# Altium PCB USB2UART.PcbDoc
Units mm, origin at the board's own origin, x right, y up, seen from the top; angles counter-clockwise.
Board outline 35.56 x 22.86 mm, 2 copper layers (Top Layer, Bottom Layer), stack 1.569 mm thick; 26 components, 19 nets, 130 pads, 26 vias.
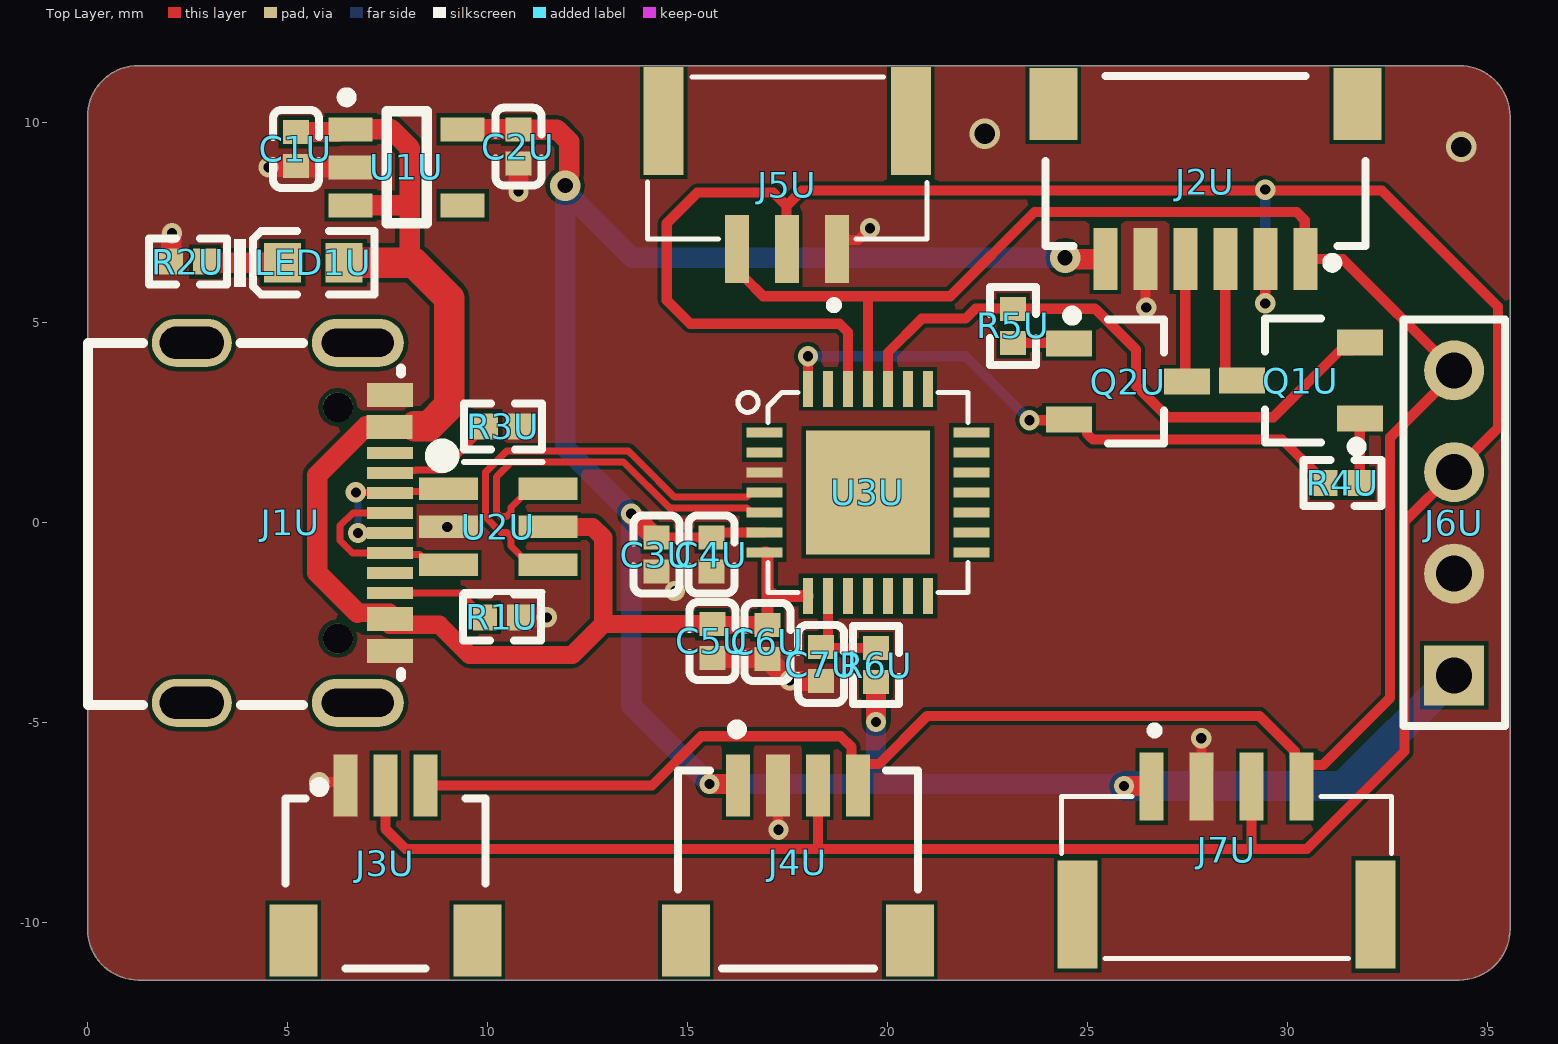
[diagram p0: Top Layer view]
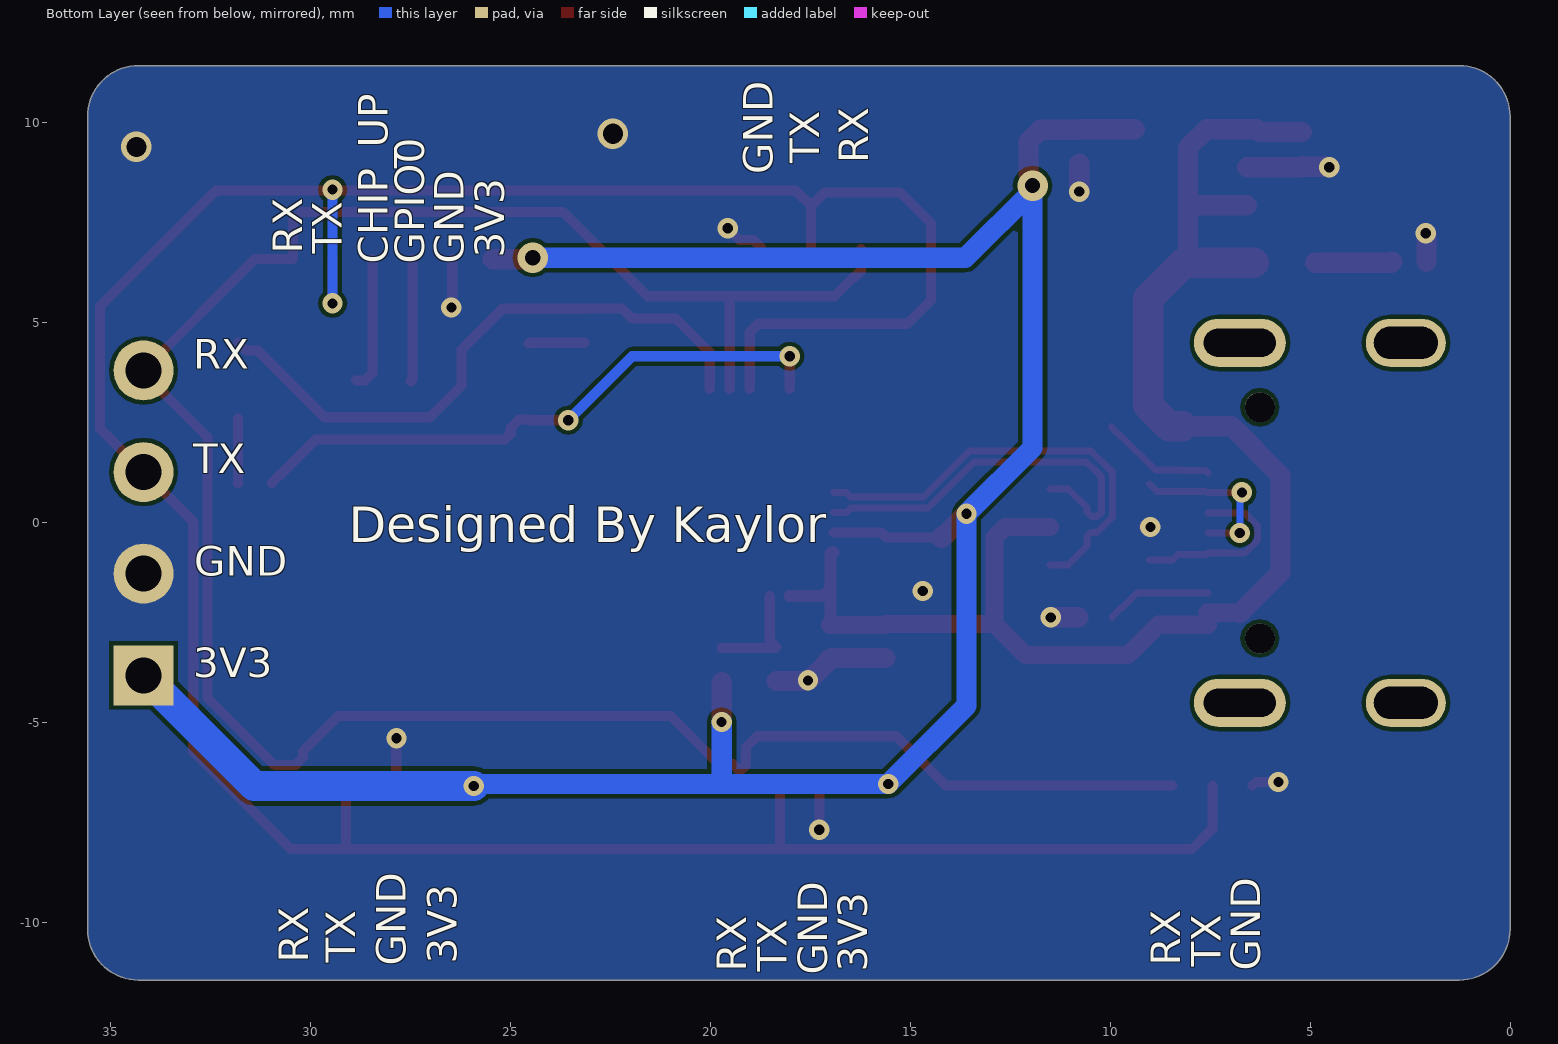
[diagram p1: Bottom Layer view, seen from below]
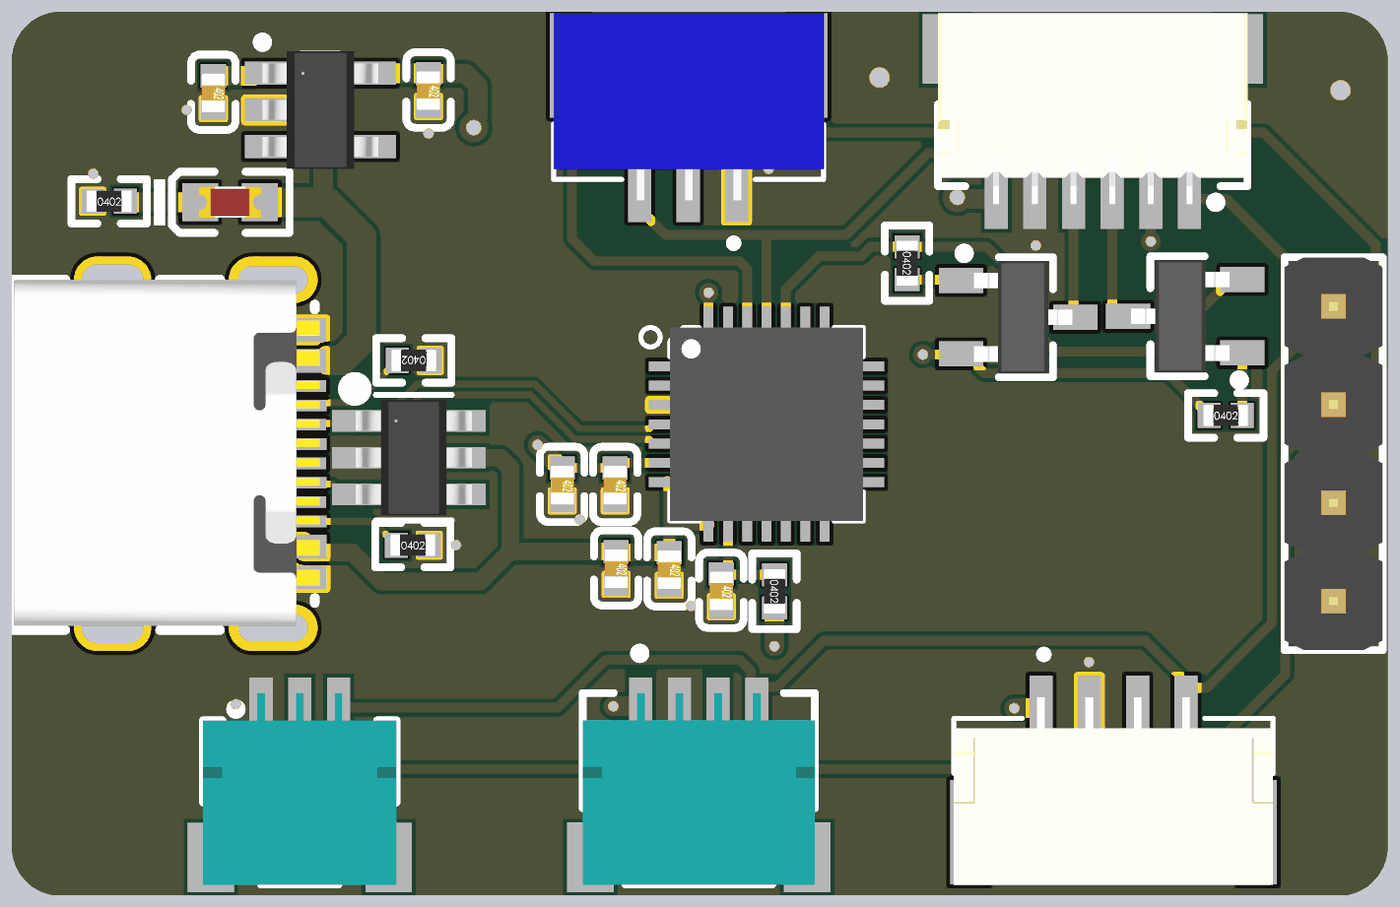
[diagram p2: 3D render of the assembled board from above, using the file's embedded part models]

## Layer stack, top to bottom
Top Solder: solder mask 0.0254, SM-001, Dk 4
Top Layer: signal copper 0.035
Dielectric 1: core 1.4986, Core-043, Dk 4.3
Bottom Layer: signal copper 0.035
Bottom Solder: solder mask 0.0254, SM-001, Dk 4

## Board outline
0,-10.16 ccw(c1.27,-10.16) 1.27,-11.43 34.29,-11.43 ccw(c34.29,-10.16) 35.56,-10.16 35.56,10.16 ccw(c34.29,10.16) 34.29,11.43 1.27,11.43 ccw(c1.27,10.16) 0,10.16

## Design rules (kind name [scope] priority, off if disabled: settings)
Clearance [All] p1: gap=0.102 ignorepadtopadclearanceinfootprint=FALSE
DiffPairsRouting [All] p1: maxlimit=0.102 minlimit=0.102 mostfreqgap=0.102 toplayer_minwidth=0.175 toplayer_maxwidth=0.175 toplayer_prefwidth=0.175 bottomlayer_minwidth=0.175 bottomlayer_maxwidth=0.175 bottomlayer_prefwidth=0.175 maxuncoupledlength=12.7
HoleSize [All] p1: absolutevalues=TRUE maxlimit=5.08 minlimit=0.025 maxpercent=80.000 minpercent=20.000
MinimumSolderMaskSliver [All] p1: minsoldermaskwidth=0
PolygonConnect [All] p1: connectstyle=Direct reliefconductorwidth=0.254 reliefentries=4 polygonreliefangle="90 Angle" airgapwidth=0.254
RoutingVias [All] p1: holewidth=0.711 width=1.27 viastyle="Through Hole" minholewidth=0.254 minwidth=0.508 maxholewidth=5.08 maxwidth=12.7
SilkToSilkClearance [All] p1: silktosilkclearance=0.025
SilkToSolderMaskClearance [IsPad] p1: minsilkscreentomaskgap=0.025 clearancetoexposedcopper=TRUE
SolderMaskExpansion [All] p1: expansion=0.102 istentingtop=FALSE
Width [All] p1: maxlimit=5.08 minlimit=0.076 preferedwidth=0.254
25 further rules are at their usual default settings.

## Classes and differential pairs
differential pair USB: +USB_P -USB_N

## Components (designator, comment, footprint, x,y, rotation, side; value= is the part's Value field where it differs from the comment)
C1U "0402 1uF（105）10% 35V" C0402 5.207,9.347 r270 top value="1uF 35V"
C2U "0402 1uF（105）10% 35V" C0402 10.77,9.405 r270 top value="1uF 35V"
C3U "0402 4.7uF(475) ±10% 10V" c0402 14.224,-0.794 r270 top value="4.7uF 10V"
C4U "0402 100nF (104) 10% 50V" C0402 15.596,-0.794 r270 top value="100nF 50V"
C5U "0402 1uF（105）10% 35V" C0402 15.621,-2.953 r270 top value="1uF 35V"
C6U "0402 100nF (104) 10% 50V" C0402 16.993,-2.979 r270 top value="100nF 50V"
C7U "0402 100nF (104) 10% 50V" C0402 18.339,-3.531 r270 top value="100nF 50V"
J1U "TYPE-C-31-M-12" TYPE-C-31-M-12 5.08,0 r90 top
J2U "SM06B-SRSS-TB(LF)(SN)" SM06B-SRSS-TB(LF)(SN) 27.94,9.042 r180 top
J3U "SM03B-SRSS-TB(LF)(SN)" SM03B-SRSS-TB(LF)(SN) 7.442,-9.017 r0 top
J4U "SM04B-SRSS-TB(LF)(SN)" SM04B-SRSS-TB(LF)(SN) 17.755,-8.661 r0 top
J5U "A1257WR-S-3P" SM03B-GHS-TB(LF)(SN) 17.501,9.119 r180 top
J6U "Header4x1 Male" 4x1 34.163,0 r90 top
J7U "A1257WR-S-4P" SM04B-GHS-TB(LF)(SN) 28.473,-8.865 r0 top
LED1U "LED_GREEN 0603" led0603 5.639,6.502 r0 top value=1mA@2.6V
Q1U "SS8550" sot-23-3 30.328,3.556 r0 top
Q2U "SS8550" sot-23-3 26.01,3.531 r180 top
R1U "0402 5.1KΩ (5101) ±1%" r0402 10.363,-2.362 r0 top value=5.1KΩ±1%
R2U "0402 4.7KΩ (4701) ±1%" r0402 2.515,6.528 r0 top value=4.7KΩ±1%
R3U "0402 5.1KΩ (5101) ±1%" r0402 10.389,2.413 r180 top value=5.1KΩ±1%
R4U "0402 4.7KΩ (4701) ±1%" r0402 31.376,0.991 r0 top value=4.7KΩ±1%
R5U "0402 4.7KΩ (4701) ±1%" r0402 23.139,4.928 r270 top value=4.7KΩ±1%
R6U "0402 4.7KΩ (4701) ±1%" r0402 19.71,-3.556 r270 top value=4.7KΩ±1%
U1U "TLV75733PDBVR" sot-23-5 7.976,8.89 r180 top
U2U "USBLC6-2SC6" sot-23-6 10.262,-0.102 r0 top
U3U "CP2102-GM" QFN28_EP 19.507,0.762 r0 top

## Footprints (in the part's own frame and the unit in brackets; to place one, negate y for a bottom-side part, rotate by r counter-clockwise, add the part's x,y. Pads: shape width x height; smd on the part's side, far side on the other; paste and mask are expansions set on the pad)
4x1 [mm] "Connector; Header; 5 Position"
  rect 1.5x1.5 hole 0.9: 1(-3.81,0)
  round 1.5 hole 0.9: 2(-1.27,0) 3(1.27,0) 4(3.81,0)
  silkscreen extent -5.08,-1.27 5.08,1.27, body extent -5.08,-1.27 5.08,1.27, height 8.54
C0402 [mm]
  rect 0.6x0.65 smd mask+0.051: 1(-0.425,0) 2(0.425,0)
  silkscreen extent -0.97,-0.58 0.97,0.58, body extent -0.48,-0.3 0.52,0.3, height 0.2
c0402 [mm]
  rect 0.6x0.65 smd mask+0.051: 1(-0.425,0) 2(0.425,0)
  silkscreen extent -0.97,-0.58 0.97,0.58, body extent -0.48,-0.3 0.52,0.3, height 0.2
led0603 [mm]
  rect 0.93x0.98 smd: 1(0.77,0) 2(-0.77,0)
  silkscreen extent -1.98,-0.79 1.54,0.79, body extent -0.8,-0.4 0.8,0.4, height 0.6
QFN28_EP [mm]
  rect 0.9x0.254 smd: 1(-2.59,1.5) 2(-2.59,1) 3(-2.59,0.5) 4(-2.59,0) 5(-2.59,-0.5) 6(-2.59,-1) 7(-2.59,-1.5) 15(2.59,-1.5) 16(2.59,-1) 17(2.59,-0.5) 18(2.59,0) 19(2.59,0.5) 20(2.59,1) 21(2.59,1.5)
  rect 0.254x0.9 smd: 8(-1.5,-2.59) 9(-1,-2.59) 10(-0.5,-2.59) 11(0,-2.59) 12(0.5,-2.59) 13(1,-2.59) 14(1.5,-2.59) 22(1.5,2.59) 23(1,2.59) 24(0.5,2.59) 25(0,2.59) 26(-0.5,2.59) 27(-1,2.59) 28(-1.5,2.59)
  rect 3.1x3.1 smd paste-3: 29(0,0)
  silkscreen extent -3.25,-2.5 2.5,2.5, body extent -2.5,-2.5 2.5,2.5, height 1
r0402 [mm]
  rect 0.6x0.65 smd mask+0.051: 1(-0.425,0) 2(0.425,0)
  silkscreen extent -0.97,-0.58 0.97,0.58, body extent -0.57,-0.27 0.58,0.28, height 0.41
SM03B-GHS-TB(LF)(SN) [mm]
  rect 0.6x1.7 smd: 1(-1.23,2.275) 2(0.02,2.275) 3(1.27,2.275)
  rect 1x2.7 smd: 4(-3.08,-0.925) 5(3.1,-0.925)
  silkscreen extent -3.48,-2.02 3.5,3.77, body extent -3.5,-2.29 3.5,2.56, height 4.33
SM03B-SRSS-TB(LF)(SN) [mm]
  rect 0.6x1.55 smd paste+0 mask+0: 1(-1,2.45) 2(0,2.45) 3(1,2.45)
  rect 1.2x1.8 smd paste+0 mask+0: 4(-2.3,-1.425) 5(2.3,-1.425)
  silkscreen extent -2.5,-2.12 2.5,2.54, body extent -3,-2.42 3,3.32, height 0.25
SM04B-GHS-TB(LF)(SN) [mm]
  rect 0.6x1.7 smd: 1(-1.875,2.275) 2(-0.625,2.275) 3(0.625,2.275) 4(1.875,2.275)
  rect 1x2.7 smd: 5(-3.725,-0.925) 6(3.725,-0.925)
  silkscreen extent -4.13,-2.02 4.13,3.77, body extent -4.12,-2.29 4.12,2.56, height 4.35
SM04B-SRSS-TB(LF)(SN) [mm]
  rect 0.6x1.55 smd paste+0 mask+0: 1(-1.5,2.1) 2(-0.5,2.1) 3(0.5,2.1) 4(1.5,2.1)
  rect 1.2x1.8 smd paste+0 mask+0: 5(-2.8,-1.775) 6(2.8,-1.775)
  silkscreen extent -3,-2.47 3,3.62, body extent -3.5,-2.78 3.5,2.98, height 0.25
SM06B-SRSS-TB(LF)(SN) [mm]
  rect 0.6x1.55 smd paste+0 mask+0: 1(-2.5,2.45) 2(-1.5,2.45) 3(-0.5,2.45) 4(0.5,2.45) 5(1.5,2.45) 6(2.5,2.45)
  rect 1.2x1.8 smd paste+0 mask+0: 7(-3.8,-1.425) 8(3.8,-1.425)
  silkscreen extent -4,-2.12 4,2.66, body extent -4,-2.35 4,2.6, height 2.95
sot-23-3 [mm]
  rect 1.15x0.65 smd: 1(1.475,-0.95) 2(1.475,0.95) 3(-1.475,0)
  silkscreen extent -0.9,-1.78 1.52,1.55, body extent -1.4,-1.46 1.14,1.46, height 1
sot-23-5 [mm]
  rect 1.1x0.6 smd: 1(1.4,-0.95) 2(1.4,0) 3(1.4,0.95) 4(-1.4,0.95) 5(-1.4,-0.95)
  silkscreen extent -0.5,-1.87 1.62,1.4, body extent -1.5,-1.52 1.5,1.52, height 1.45
sot-23-6 [mil]
  rect 58x22 smd paste+0 mask+0: 1(-49,37.4) 2(-49,0) 3(-49,-37.4) 4(49,-37.4) 5(49,0) 6(49,37.4)
  silkscreen extent -62,-64 44,77, body extent -54,-59 64,59, height 57
TYPE-C-31-M-12 [mm]
  rect 0.3x1.15 smd: A1(3.35,-2.473) A4(2.55,-2.471) A5(1.25,-2.475) A6(0.25,-2.475) A7(-0.25,-2.473) A9(-2.55,-2.475) A12(-3.35,-2.475) B1(-3.05,-2.475) B4(-2.25,-2.475) B5(-1.75,-2.475) B6(-0.75,-2.475) B7(0.75,-2.473) B9(2.25,-2.471) B12(3.05,-2.473)
  rect 0.3x1.148 smd: A8(1.75,-2.475) B8(-1.25,-2.475)
  oval 1.2x2.3 hole 0.7 slot 1.8 at 90 deg: M1(-4.5,-1.675) M4(4.5,-1.675)
  oval 1.2x2 hole 0.8 slot 1.6 at 90 deg: M2(-4.5,2.475) M3(4.5,2.475)
  round 0.75 hole 0.75 unplated: ""(-2.89,-1.175) ""(2.89,-1.175)
  silkscreen extent -4.56,-2.75 4.5,5.08, body extent -4.44,-2.87 4.5,5.03, height 3.25

## Part data
C1U C2U C5U: Package=0402, Supplier 1 Part Number=CM05X5R105K35AH, Component Type=C, Part Number="0402 1uF（105）10% 35V", Supplier 1="kyocera 京瓷", Type=Capacitor
C3U: Package=0402, Supplier 1 Part Number=CL05A475KP5NRNC, Component Type=C, Part Number="0402 4.7uF(475) ±10% 10V", Supplier 1=SAMSUNG(三星), Type=Capacitor
C4U C6U C7U: Package=0402, Supplier 1 Part Number=CC0402KRX5R9BB104, Component Type=C, Part Number="0402 100nF (104) 10% 50V", Supplier 1=YAGEO(国巨), Type=Capacitor
J1U: "Type-C 16pin Connector", Manufacturer=韩荣, Component Type=Z, Package=TYPE-C-31-M-12, Part Number=TYPE-C-31-M-12, Supplier 1=韩荣, Supplier 1 Part Number=TYPE-C-31-M-12, Type=Connector
J2U: "1.0mm pitch/Disconnectable Insulation displacement connectors", Manufacturer=JST, Package=Header6, Component Type=A, Part Number=SM06B-SRSS-TB(LF)(SN), Supplier 1=JST, Supplier 1 Part Number=SM06B-SRSS-TB(LF)(SN), Type=Connector
J3U: "1.0mm pitch/Disconnectable Insulation displacement connectors", Manufacturer=JST, Package=Header3, Component Type=A, Part Number=SM03B-SRSS-TB(LF)(SN), Supplier 1=JST, Supplier 1 Part Number=SM03B-SRSS-TB(LF)(SN), Type=Connector
J4U: "1.0mm pitch/Disconnectable Insulation displacement connectors", Manufacturer=JST, Package=Header4, Component Type=A, Part Number=SM04B-SRSS-TB(LF)(SN), Supplier 1=JST, Supplier 1 Part Number=SM04B-SRSS-TB(LF)(SN), Type=Connector
J5U J7U: Manufacturer=CJT, Component Type=A, Supplier 1=CJT, Type=Connector
  J5U: Package=A1257WR-S-3P, Part Number=A1257WR-S-3P, Supplier 1 Part Number=A1257WR-S-3P
  J7U: Package=A1257WR-S-4P, Part Number=A1257WR-S-4P, Supplier 1 Part Number=A1257WR-S-4P
J6U: Package=Header4x1, Component Type=Z, Part Number="Header4x1 Male", Type=Connector
LED1U: Package=0603, Supplier 1 Part Number=NCD0603G2, Component Type=C, Part Number="LED_GREEN 0603", Supplier 1=国星光电, Type=LED
Q1U Q2U: "25V NPN", Manufacturer=JCST, Package=sot-23-3, Component Type=B, Part Number=SS8550, Supplier 1=JCST, Supplier 1 Part Number=SS8550, Type=IC
R1U R3U: Package=0402, Supplier 1 Part Number=RC0402FR-075K1L, Component Type=C, Part Number="0402 5.1KΩ (5101) ±1%", Supplier 1=YAGEO(国巨), Type=Resistor
R2U R4U R5U R6U: Package=0402, Supplier 1 Part Number=RC0402FR-074K7L, Component Type=C, Part Number="0402 4.7KΩ (4701) ±1%", Supplier 1=YAGEO(国巨), Type=Resistor
U1U: "TLV757 1000mA 3.3V", Manufacturer=TI, Package=sot-23-5, Component Type=A, Part Number=TLV75733PDBVR, Supplier 1=TI, Supplier 1 Part Number=TLV75733PDBVR, Type=IC
U2U: "Very low capacitance ESD protection", Manufacturer=ST, Package=sot-23-6, Component Type=A, Part Number=USBLC6-2SC6, Supplier 1=ST, Supplier 1 Part Number=USBLC6-2SC6, Type=IC
U3U: "Single-Chip USB to UART Data Transfer", Manufacturer="Silicon Labs", Package=QFN28, Component Type=Z, Part Number=CP2102-GM, Supplier 1="Silicon Labs", Supplier 1 Part Number=CP2102-GM, Type=IC

## Via types
v1: diameter 0.508, hole 0.254, Top Layer to Bottom Layer, tented both sides, 22 vias
v2: diameter 0.762, hole 0.508, Top Layer to Bottom Layer, tented both sides, 2 vias
v3: diameter 0.762, hole 0.381, Top Layer to Bottom Layer, tented both sides, 2 vias

## Nets (pads, with @x,y where several pads share a name; then routed paths per layer and width w, separated by ;. In a path a pad name is that pad's centre, name@x,y a point inside that pad or via, vN(x,y) a via of type N, cw(c..) or ccw(c..) an arc to the next point about the centre after c; other vN are vias at no path point)
3V3: C2U.1 C3U.1 C4U.1 J2U.6 J4U.1 J6U.1 J7U.1 R6U.2 U1U.5 U3U.6 | length 62
  Top Layer w0.254: C3U.1 C4U.1 15.727,-0.238 U3U.6 ; J4U.1@16.221,-6.528 J4U.1
  Top Layer w0.508: U1U.5 10.759,9.84 C2U.1 11.735,9.83 12.04,9.525 12.04,8.714 11.987,8.661 11.987,8.481 v3(11.938,8.433) v3@11.913,8.407 ; v1(13.589,0.229) 14.141,-0.323 14.178,-0.323 C3U.1 ; v1(15.545,-6.528) J4U.1@16.221,-6.528 ; v1(19.71,-4.978) R6U.2 ; v3(24.435,6.629) 24.472,6.592 J2U.6 ; v1(25.908,-6.579) 26.587,-6.579 J7U.1
  Bottom Layer w0.508: v3(11.938,8.433) v3@11.938,8.306 ; v1(19.71,-4.978) 19.71,-6.528 ; v3(24.435,6.629) 13.614,6.629 v3@11.938,8.306 ; v1(25.908,-6.579) 25.857,-6.528 19.71,-6.528 ; v3@11.938,8.306 11.938,1.88 v1(13.589,0.229) 13.589,-4.572 v1(15.545,-6.528) 19.71,-6.528
  Bottom Layer w0.762: v1(25.908,-6.579) 31.394,-6.579 J6U.1
CHIP_UP: J2U.3 Q1U.3 | length 3.3
  Top Layer w0.254: J2U.3 28.44,3.754 28.638,3.556 Q1U.3
DN: J1U.A7 J1U.B7 U2U.1 | length 4.2
  Top Layer w0.175: v1(6.706,0.762) 6.711,0.756 7.547,0.756 J1U.B7 7.586,0.784 8.825,0.784 U2U.1@9.017,0.975 ; v1(6.756,-0.254) 6.758,-0.252 7.551,-0.252 J1U.A7
  Bottom Layer w0.175: v1(6.706,0.762) 6.756,0.711 v1(6.756,-0.254)
DP: J1U.A6 J1U.B6 U2U.3 | length 4.6
  Top Layer w0.175: J1U.A6 6.634,0.25 6.313,-0.07 6.313,-0.438 6.626,-0.75 J1U.B6 7.59,-0.786 8.294,-0.786 8.433,-0.925 U2U.3@9.017,-0.925
DTR: Q2U.2 R4U.1 U3U.28 | length 15.2
  Top Layer w0.254: U3U.28 18.007,4.164 v1(18.009,4.166) ; v1(23.546,2.565) 24.519,2.565 Q2U.2 24.785,2.581 24.983,2.383 24.983,2.232 25.131,2.083 29.859,2.083 30.753,1.189 30.778,1.189 30.951,1.016 R4U.1
  Bottom Layer w0.254: v1(18.009,4.166) 21.946,4.166 v1(23.546,2.565)
GND: C1U.2 C2U.2 C3U.2 C4U.2 C5U.2 C6U.2 C7U.2 J1U.A1 J1U.A12 J1U.B1 J1U.B12 J2U.5 J3U.1 J4U.2 J5U.1 J6U.2 J7U.2 R1U.2 R2U.1 R3U.1 U1U.2 U2U.2 U3U.3 | length 12.5
  Top Layer w0.254: v1(5.791,-6.477) 6.352,-6.477 J3U.1 ; J4U.2 17.263,-6.57 17.263,-7.662 v1(17.272,-7.671) ; J5U.1 18.731,6.898 18.904,7.071 19.263,7.071 v1(19.558,7.366) ; J2U.5 26.446,6.586 26.446,5.406 v1(26.467,5.385) ; v1(27.838,-5.385) 27.843,-5.39 27.843,-6.585 J7U.2
  Top Layer w0.508: R2U.1 2.09,7.22 v1(2.108,7.239) ; v1(4.521,8.89) 4.537,8.906 5.19,8.906 C1U.2 5.239,8.89 U1U.2 ; v1(8.992,-0.102) U2U.2 ; v1(10.77,8.28) C2U.2 ; R1U.2 v1(11.481,-2.362) ; C5U.2 16.967,-3.378 C6U.2 17.018,-3.404 17.064,-3.45 17.064,-3.475 17.526,-3.937 v1(17.551,-3.937) 17.57,-3.956 C7U.2
  other v1: 14.681,-1.702
  other v2: 34.341,9.398 22.428,9.728
GPIO0: J2U.4 Q2U.3 | length 3.1
  Top Layer w0.254: J2U.4 27.44,3.575 Q2U.3
NetC7U_1: C7U.1 R6U.1 U3U.9 | length 2.7
  Top Layer w0.254: U3U.9 18.507,-2.937 C7U.1 18.364,-3.131 R6U.1
NetJ1U_A5: J1U.A5 R3U.2 | length 2.9
  Top Layer w0.175: J1U.A5 7.618,1.312 8.198,1.312 8.202,1.317 8.868,1.317 9.726,2.175 9.751,2.175 9.964,2.388 R3U.2
NetJ1U_B5: J1U.B5 R1U.1 | length 2.7
  Top Layer w0.175: J1U.B5 9.326,-1.75 9.701,-2.125 9.726,-2.125 9.938,-2.337 R1U.1
NetLED1U_2: LED1U.2 R2U.2 | length 1.9
  Top Layer w0.508: R2U.2 2.965,6.502 LED1U.2
NetQ1U_1: Q1U.1 R4U.2 | length 1.6
  Top Layer w0.254: R4U.2 31.803,0.992 Q1U.1
NetQ2U_1: Q2U.1 R5U.2 | length 1.4
  Top Layer w0.254: R5U.2 24.513,4.503 Q2U.1
RTS: Q1U.2 R5U.1 U3U.24 | length 15.6
  Top Layer w0.254: U3U.24 20.007,4.259 20.853,5.105 21.946,5.105 22.2,5.359 23.133,5.359 R5U.1 25.187,5.353 26.213,4.327 26.213,3.429 27,2.642 29.642,2.642 31.308,4.308 31.605,4.308 Q1U.2
RXD: J2U.1 J3U.3 J4U.4 J5U.3 J6U.4 J7U.4 U3U.25 | length 60.3
  Top Layer w0.254: J3U.3 14.109,-6.567 15.342,-5.334 18.821,-5.334 19.099,-5.611 19.099,-6.046 19.255,-6.202 19.428,-6.029 19.787,-6.029 20.99,-4.826 29.29,-4.826 30.175,-5.711 30.175,-5.867 30.366,-6.057 30.881,-6.057 32.563,-4.375 32.563,2.143 34.163,3.743 J6U.4 31.381,6.592 J2U.1 30.429,6.603 30.429,7.569 30.226,7.772 23.673,7.772 21.565,5.664 19.507,5.664 ; J5U.3@16.093,6.706 J5U.3 16.231,6.294 16.404,6.121 16.435,6.121 16.891,5.664 19.507,5.664 ; U3U.25 19.507,5.664
TXD: J2U.2 J3U.2 J4U.3 J5U.2 J6U.3 J7U.3 U3U.26 | length 78.9
  Top Layer w0.254: J3U.2 7.442,-7.645 7.95,-8.153 18.339,-8.153 ; J5U.2 17.474,6.85 17.474,7.926 ; J4U.3 18.255,-8.069 18.339,-8.153 ; U3U.26 19.007,4.767 18.796,4.978 15.062,4.978 14.478,5.563 14.478,7.493 15.24,8.255 17.145,8.255 17.474,7.926 ; J7U.3 29.098,-8.067 29.185,-8.153 ; v1(29.439,5.486) J2U.2@29.439,6.592 ; 17.474,7.926 17.854,8.306 32.36,8.306 35.255,5.41 35.255,2.362 J6U.3 32.918,0.025 32.918,-5.715 30.48,-8.153 29.185,-8.153 ; 18.339,-8.153 29.185,-8.153
  Bottom Layer w0.254: v1(29.439,5.486) v1(29.439,8.331)
USB_N: U2U.6 U3U.5 | length 9.9
  Top Layer w0.175: U2U.6 11.049,0.848 10.58,0.38 10.58,0.271 10.467,0.157 10.322,0.157 10.219,0.26 10.219,1.152 10.592,1.524 13.401,1.524 14.551,0.374 16.483,0.374 16.594,0.262 U3U.5
USB_P: U2U.4 U3U.4 | length 11
  Top Layer w0.175: U2U.4 11.049,-1.052 10.58,-0.583 10.58,-0.342 10.478,-0.24 10.328,-0.24 9.943,0.145 9.943,1.266 10.477,1.801 13.516,1.801 13.679,1.637 13.843,1.473 14.666,0.65 16.483,0.65 16.594,0.762 U3U.4
VBUS: C1U.1 C5U.1 C6U.1 J1U.A4 J1U.A9 J1U.B4 J1U.B9 LED1U.1 U1U.1 U1U.3 U2U.5 U3U.7 U3U.8 | length 38.5
  Top Layer w0.305: U3U.7 16.967,-0.738 16.993,-0.763 16.993,-1.658 ; C6U.1 16.993,-1.658 ; U3U.8 17.162,-1.828 16.993,-1.658
  Top Layer w0.457: 6.746,-2.25 J1U.B4 ; J1U.A9 8.798,-2.55 9.55,-3.302 12.116,-3.302 12.89,-2.528 ; U2U.5 12.622,-0.102 12.89,-0.369 12.89,-2.528 ; C6U.1 15.646,-2.554 C5U.1 12.89,-2.528
  Top Layer w0.508: C1U.1 6.258,9.772 6.326,9.84 U1U.1 7.584,9.84 8.052,9.373 8.052,7.988 ; U1U.3 8.003,7.94 8.052,7.988 ; 6.746,-2.25 5.74,-1.245 5.74,1.194 6.96,2.413 8.174,2.413 8.179,2.417 ; 8.153,6.502 8.052,6.604 8.052,7.988
  Top Layer w0.762: LED1U.1 8.153,6.502 9.042,5.613 9.042,2.936 8.524,2.417 8.179,2.417
pads on no net: J1U. J1U.A8 J1U.B8 J1U.M1 J1U.M2 J1U.M3 J1U.M4 J2U.7 J2U.8 J3U.4 J3U.5 J4U.5 J4U.6 J5U.4 J5U.5 J7U.5 J7U.6 U1U.4 U3U.1 U3U.2 U3U.10 U3U.11 U3U.12 U3U.13 U3U.14 U3U.15 U3U.16 U3U.17 U3U.18 U3U.19 U3U.20 U3U.21 U3U.22 U3U.23 U3U.27 U3U.29

## Polygon pours and split planes (outlines as drawn)
GND on Top Layer "GND_L01_P000" (solid, remove dead copper, pour order 0): 0,-10.16 ccw(c1.27,-10.16) 1.27,-11.43 34.29,-11.43 ccw(c34.29,-10.16) 35.56,-10.16 35.56,10.16 ccw(c34.29,10.16) 34.29,11.43 1.27,11.43 ccw(c1.27,10.16) 0,10.16
GND on Bottom Layer "GND_L02_P001" (solid, remove dead copper, pour order 1): 0,-10.16 ccw(c1.27,-10.16) 1.27,-11.43 34.29,-11.43 ccw(c34.29,-10.16) 35.56,-10.16 35.56,10.16 ccw(c34.29,10.16) 34.29,11.43 1.27,11.43 ccw(c1.27,10.16) 0,10.16

## Silkscreen, mask and mechanical layers (free items; w line width, h text height)
Bottom Overlay:
  text "RX" at 15.799,8.992 h1.27 r270
  text "TX" at 17.018,8.992 h1.27 r270
  text "GND" at 18.186,8.712 h1.27 r270
  text "TX" at 28.956,6.731 h1.27 r270
  text "RX" at 29.947,6.731 h1.27 r270
  text "3V3" at 24.892,6.629 h1.27 r270
  text "GND" at 25.908,6.477 h1.27 r270
  text "GPIO0" at 26.899,6.477 h1.27 r270
  text "CHIP_UP" at 27.813,6.477 h1.27 r270
  text "RX" at 32.918,3.607 h1.27
  text "TX" at 32.918,0.991 h1.27
  text "Designed By Kaylor" at 29.032,-0.787 h1.52
  text "GND" at 32.893,-1.575 h1.27
  text "3V3" at 32.918,-4.115 h1.27
  text "TX" at 28.626,-10.998 h1.27 r270
  text "RX" at 29.792,-11.001 h1.27 r270
  text "3V3" at 26.086,-11.024 h1.27 r270
  text "RX" at 8.001,-11.074 h1.27 r270
  text "GND" at 27.356,-11.074 h1.27 r270
  text "TX" at 6.985,-11.1 h1.27 r270
  text "GND" at 5.994,-11.201 h1.27 r270
  text "3V3" at 15.824,-11.227 h1.27 r270
  text "TX" at 17.831,-11.227 h1.27 r270
  text "RX" at 18.847,-11.227 h1.27 r270
  text "GND" at 16.815,-11.303 h1.27 r270
Outline:
  lines w0.254: 0,-10.16 ccw(c1.27,-10.16) 1.27,-11.43 28.956,-11.43 34.29,-11.43 ccw(c34.29,-10.16) 35.56,-10.16 35.56,10.16 ccw(c34.29,10.16) 34.29,11.43 1.27,11.43 ccw(c1.27,10.16) 0,10.16 0,-10.16